# Altium PCB PCB1.PcbDoc
Units mm, origin at the board's own origin, x right, y up, seen from the top; angles counter-clockwise.
Board outline 152.4 x 101.6 mm, 2 copper layers (Top Layer, Bottom Layer); 43 components, 25 nets, 151 pads, 0 vias.
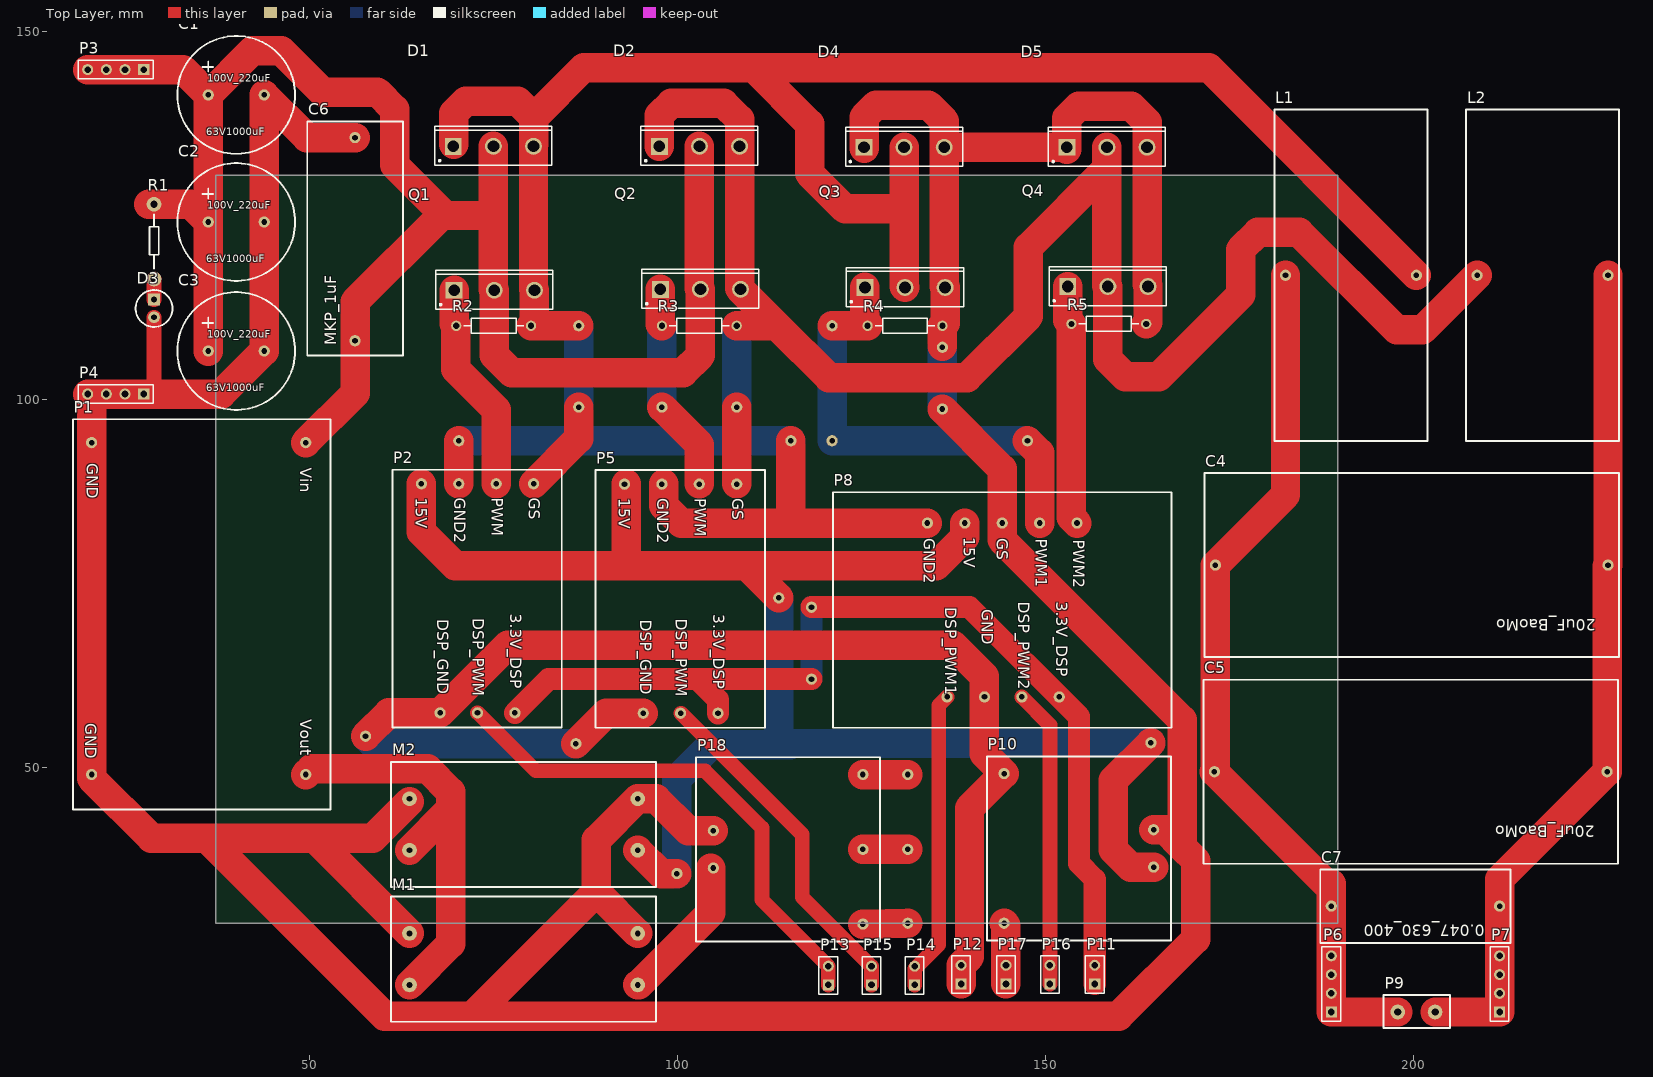
[diagram p0: Top Layer view]
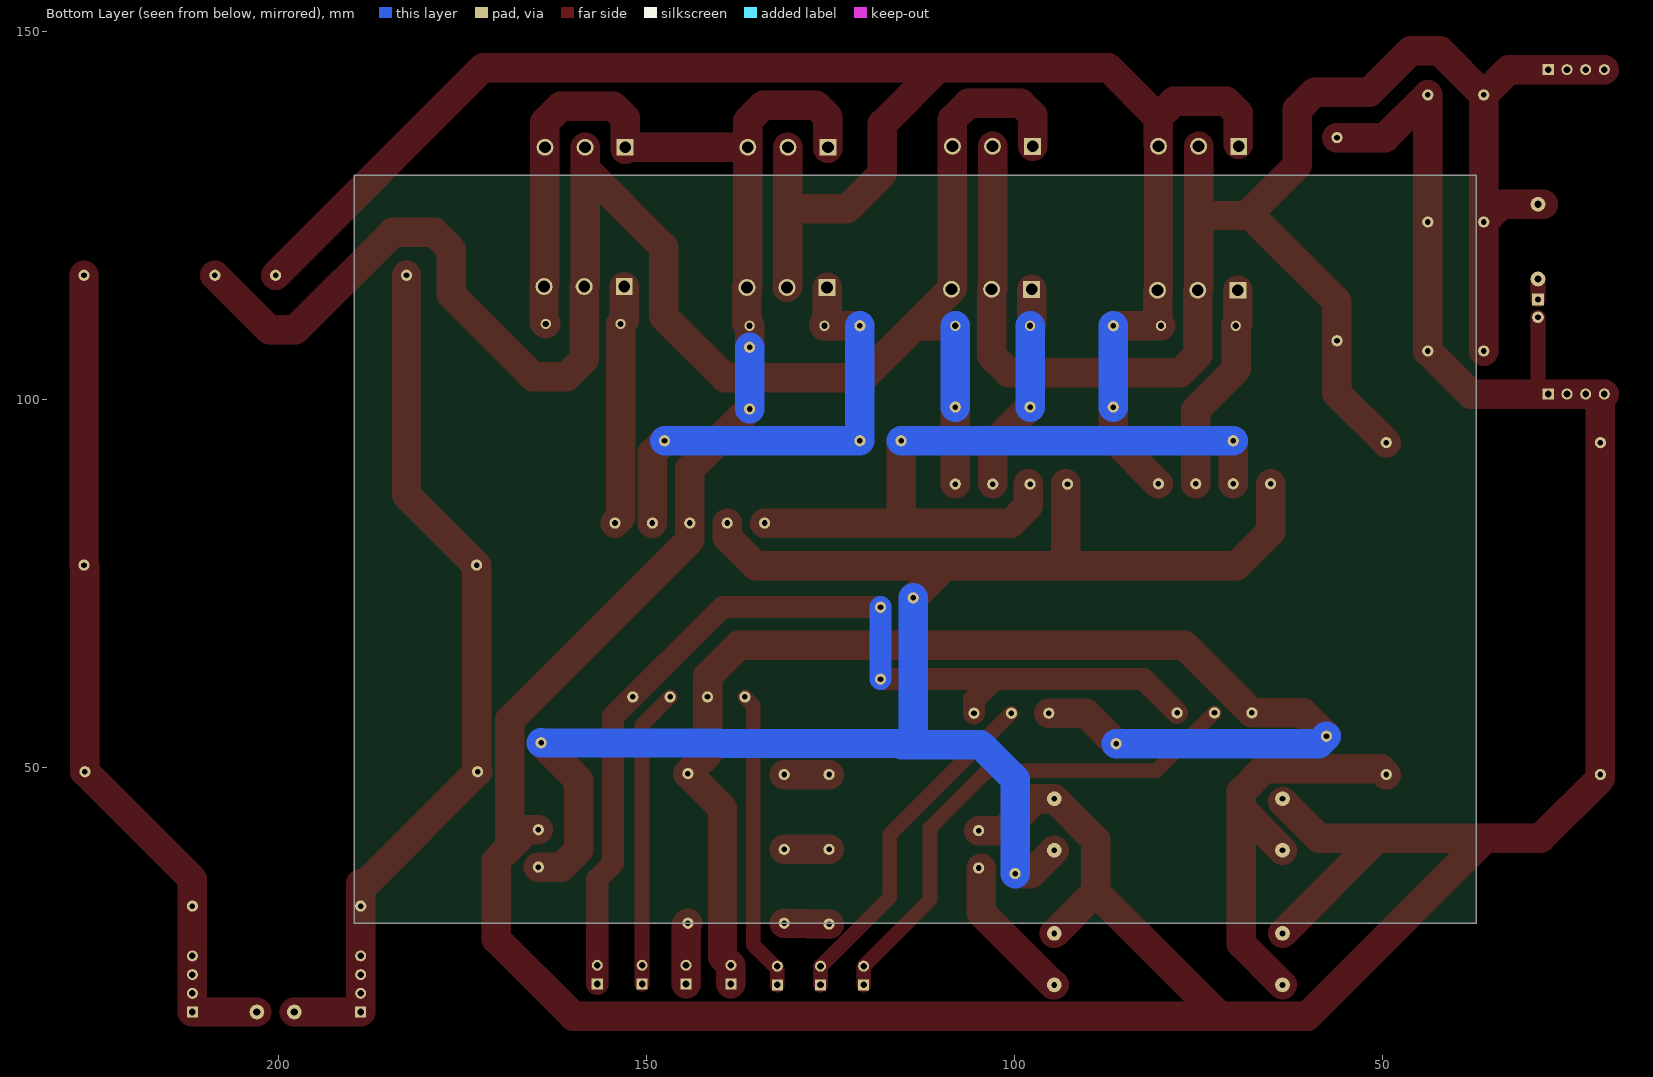
[diagram p1: Bottom Layer view, seen from below]

## Layer stack, top to bottom
Top Solder: solder mask 0.0102, Solder Resist, Dk 3.5
Top Layer: signal copper 0.0356
Dielectric 1: dielectric 0.32, FR-4, Dk 4.8
Bottom Layer: signal copper 0.0356
Bottom Solder: solder mask 0.0102, Solder Resist, Dk 3.5

## Board outline
37.338,28.829 189.738,28.829 189.738,130.429 37.338,130.429

## Design rules (kind name [scope] priority, off if disabled: settings)
Clearance [All] p1: gap=0.254 ignorepadtopadclearanceinfootprint=FALSE except(0: Arc-Hole Track-Hole SMDPad-Hole THPad-Hole Via-Hole Fill-Hole Poly-Hole Region-Hole Text-Hole)
PolygonConnect [All] p1: connectstyle=Relief reliefconductorwidth=0.254 reliefentries=4 polygonreliefangle="90 Angle" airgapwidth=0.254
RoutingVias [All] p1: holewidth=0.711 width=1.27 viastyle="Through Hole" minholewidth=0.711 minwidth=1.27 maxholewidth=0.711 maxwidth=1.27
SolderMaskExpansion [All] p1: expansion=0.102
Width [All] p1: maxlimit=5 minlimit=0.254 preferedwidth=0.254
30 further rules are at their usual default settings.

## Components (designator, comment, footprint, x,y, rotation, side; value= is the part's Value field where it differs from the comment)
C1 "Cap Pol1" C_1000uF_220uF 36.29,141.351 r0 top value=1000uF
C2 "Cap Pol1" C_1000uF_220uF 36.29,124.079 r0 top value=1000uF
C3 "Cap Pol1" C_1000uF_220uF 36.29,106.553 r0 top value=220uF
C4 "Cap Semi" C_20uF_BaoMo 226.441,77.47 r180 top value=20uF
C5 "Cap Semi" C_20uF_BaoMo 226.314,49.403 r180 top value=20uF
C6 "Cap Pol1" C_MKP_1uF 56.229,107.95 r90 top value=1uF
C7 "Cap Semi" C_0047_630_400_47nF 211.709,31.147 r180 top value=47nF
D1 "Diode" SiC-MOS 69.564,134.366 r0 top
D2 "Diode" SiC-MOS 97.558,134.366 r0 top
D3 "LED1" LED 28.924,113.538 r270 top
D4 "Diode" SiC-MOS 125.349,134.239 r0 top
D5 "Diode" SiC-MOS 152.908,134.239 r0 top
L1 "2mH" L_2mH 200.406,116.84 r180 top
L2 "2mH" L_2mH 226.441,116.84 r180 top
M1 "DC/DC_KeTiaoShengYaMoKuai" DC/DC-KeTiaoShengYaMoBan 94.627,20.447 r180 top
M2 "DC/DC_KeTiaoShengYaMoKuai" DC/DC-KeTiaoShengYaMoBan 94.627,38.735 r180 top
P1 "LM2596_Moldel" LM2596_Moldel 17.907,97.282 r270 top
P2 "SiC_Power" SiC_Power 61.309,90.424 r270 top
P3 "Header 4" HDR1X4 27.527,144.78 r180 top
P4 "Header 4" HDR1X4 27.527,100.711 r180 top
P5 "SiC_Power" SiC_Power 88.9,90.372 r270 top
P6 "Header 4" HDR1X4 188.849,16.764 r90 top
P7 "Header 4" HDR1X4 211.709,16.764 r90 top
P8 "SiC_Power_2" SiC_Power_2 121.793,92.583 r270 top
P9 "DuanZi" DuanZi 197.866,16.764 r0 top
P10 "Power_9-36V_5V" Power_9-36V/5V 164.719,36.449 r180 top
P11 "Header 2" HDR1X2 156.718,20.574 r90 top
P12 "Header 2" HDR1X2 138.557,20.574 r90 top
P13 "Header 2" HDR1X2 120.523,20.447 r90 top
P14 "Header 2" HDR1X2 132.249,20.447 r90 top
P15 "Header 2" HDR1X2 126.386,20.447 r90 top
P16 "Header 2" HDR1X2 150.622,20.574 r90 top
P17 "Header 2" HDR1X2 144.653,20.574 r90 top
P18 "Power_18-36V/+-15V" Power_18-36V/-+15V 104.902,38.862 r0 top
Q1 "NMOS-2" SiC-MOS 69.691,114.808 r0 top
Q2 "NMOS-2" SiC-MOS 97.685,114.935 r0 top
Q3 "NMOS-2" SiC-MOS 125.476,115.189 r0 top
Q4 "NMOS-2" SiC-MOS 153.035,115.316 r0 top
R1 "Res2" R 28.924,126.492 r270 top value=20k
R2 "Res2" AXIAL-0.4 75.057,109.982 r180 top value=10k
R3 "Res2" AXIAL-0.4 102.997,109.982 r180 top value=10k
R4 "Res2" AXIAL-0.4 130.937,109.982 r180 top value=10k
R5 "Res2" AXIAL-0.4 158.623,110.236 r180 top value=10k

## Footprints (in the part's own frame and the unit in brackets; to place one, negate y for a bottom-side part, rotate by r counter-clockwise, add the part's x,y. Pads: shape width x height; smd on the part's side, far side on the other; paste and mask are expansions set on the pad)
AXIAL-0.4 [mm] "Axial Device, Thru-Hole; 2 Leads; 0.4 in Pin Spacing"
  round 1.4 hole 0.85: 1(-5.08,0) 2(5.08,0)
  silkscreen extent -4.06,-1.02 4.06,1.02
C_20uF_BaoMo [mil]
  round 60 hole 30: 1(0,0) 2(2100,0)
  silkscreen extent -59,-492 2159,492
C_0047_630_400_47nF [mil]
  round 60 hole 30: 1(0,0) 2(900,0)
  silkscreen extent -59,-197 959,197
C_1000uF_220uF [mil]
  round 60 hole 30: 1(0,0) 2(299.21,0)
  silkscreen extent -165,-315 465,315
C_MKP_1uF [mil]
  round 60 hole 30: 1(0,0) 2(1086.61,0)
  silkscreen extent -79,-256 1173,256
DC/DC-KeTiaoShengYaMoBan [mm]
  round 2 hole 0.8: 1(0,0) 2(0,-7) 3(31,-7) 4(31,0)
  silkscreen extent -2.5,-12 33.5,5
DuanZi [mm]
  round 2 hole 1 unplated: 1(0,0) 2(5.08,0)
  silkscreen extent -1.91,-2.16 7.11,2.29
HDR1X2 [mm] "Connector; Header; 2 Position"
  rect 1.5x1.5 hole 0.9: 1(0,0)
  round 1.5 hole 0.9: 2(2.54,0)
  silkscreen extent -1.27,-1.27 3.81,1.27
HDR1X4 [mm] "Connector; Header; 4 Position"
  rect 1.5x1.5 hole 0.9: 1(0,0)
  round 1.5 hole 0.9: 2(2.54,0) 3(5.08,0) 4(7.62,0)
  silkscreen extent -1.27,-1.27 8.89,1.27
L_2mH [mil]
  round 60 hole 30: 1(0,0) 2(700,0)
  silkscreen extent -59,-886 759,886
LED [mm]
  rect 1.6x1.6 hole 0.8 unplated: 1(0,0)
  round 1.6 hole 0.8 unplated: 2(2.4,0)
  silkscreen extent -1.3,-2.5 3.7,2.5
LM2596_Moldel [mil]
  round 60 hole 30: 1(125,1245) 2(125,100) 3(1900,100) 4(1900,1245)
  silkscreen extent 0,0 2087,1378
Power_9-36V/5V [mil]
  round 60 hole 30: 1(0,0) 2(0,-200) 3(800,-500) 4(800,300)
  silkscreen extent -92,-592 892,392
Power_18-36V/-+15V [mil]
  round 60 hole 30: 1(0,100) 2(0,-100) 3(800,-400) 4(800,400) 5(800,0)
  silkscreen extent -92,-492 892,492
R [mm]
  round 2 hole 1: 1(0,0) 2(10.16,0)
  silkscreen extent 1.4,-0.63 8.76,0.64
SiC-MOS [mm]
  rect 2.3x2.3 hole 1.6: 1(0.011,0)
  round 2.3 hole 1.6: 2(5.461,0) 3(10.911,0)
  silkscreen extent -2.49,-2.6 13.41,2.7, body extent -2.49,-2.6 13.41,2.7, height 24.6
SiC_Power [mil]
  round 60 hole 30: 1(75,755) 2(75,555) 3(75,355) 4(75,155) 5(1300,255) 6(1300,455) 7(1300,655)
  silkscreen extent 0,0 1378,906
SiC_Power_2 [mil]
  round 60 hole 30: 1(370,1280) 2(370,1080) 3(370,880) 4(370,680) 5(370,480) 6(1300,585) 7(1300,785) 8(1300,985) 9(1300,1185)
  silkscreen extent 205,-25 1465,1786

## Part data
C1 C2 C3 C6: "Polarized Capacitor (Radial)", LatestRevisionDate=17-Jul-2002, LatestRevisionNote="Re-released for DXP Platform.", PackageDescription="Polarized Capacitor (Radial); 2 Leads", PackageReference=RB7.6-15, Published=8-Jun-2000, Publisher="Altium Limited"
C4 C5 C7: "Capacitor (Semiconductor SIM Model)", LatestRevisionDate=29-May-2009, LatestRevisionNote="IPC-7351 Footprint Added.", PackageDescription="Chip Capacitor", PackageReference=C1206, Published=8-Jun-2000, Publisher="Altium Limited"
D3: "Typical RED GaAs LED", LatestRevisionDate=08-Jul-2005, LatestRevisionNote="Mech Layer 1 removed.", PackageDescription="LED; 2 Leads", PackageReference=LED-1, Published=8-Jun-2000, Publisher="Altium Limited"
L1 L2: library part L
P3 P4 P6 P7: "Header, 4-Pin", LatestRevisionDate=17-Jul-2002, LatestRevisionNote="Re-released for DXP Platform.", Publisher="Altium Limited"
P11 P12 P13 P14 P15 P16 P17: "Header, 2-Pin", LatestRevisionDate=17-Jul-2002, LatestRevisionNote="Re-released for DXP Platform.", Publisher="Altium Limited"
Q1 Q2 Q3 Q4: "N-Channel Power MOSFET", ComponentLink1Description="Manufacturer Link", ComponentLink1URL=http://www.irf.com/, DatasheetVersion=PD-9.814, LatestRevisionDate=17-Jul-2002, LatestRevisionNote="Re-released for DXP Platform.", Note="Pin 2 is electrically connected to pin 4.", PackageDescription="TO, Thru-Hole, Vertical, Heatsink Mounted; 3 In-Line Leads; Pitch 2.54 mm", PackageReference=TO-220AB, PackageVersion=Feb-1997, Published=8-Jun-2000, Publisher="Altium Limited"
R1 R2 R3 R4 R5: "Resistor", LatestRevisionDate=17-Jul-2002, LatestRevisionNote="Re-released for DXP Platform.", PackageDescription="Axial Device, Thru-Hole; 2 Leads; 0.4 in Pin Spacing", PackageReference=AXIAL-0.4, Published=8-Jun-2000, Publisher="Altium Limited"

## Free pads (board coordinates)
  round 1.524 hole 0.762: 32(86.614,109.982) 33(86.614,98.933) 34(121.031,109.982) 35(136.017,107.061) 36(97.917,98.933) 37(108.077,98.933) 38(136.017,98.679) 39(121.031,94.361) 42(115.443,94.361) 43(70.326,94.361) 44(147.574,94.361) 48(113.792,73.025) 49(99.949,35.56) 50(164.338,53.34) 53(57.658,54.229) 55(86.233,53.213) 56(118.237,61.976) 57(118.237,71.755) 58(131.318,28.829) 59(131.318,38.862) 60(131.318,49.022)

## Nets (pads, with @x,y where several pads share a name; then routed paths per layer and width w, separated by ;. In a path a pad name is that pad's centre, name@x,y a point inside that pad or via, vN(x,y) a via of type N, cw(c..) or ccw(c..) an arc to the next point about the centre after c; other vN are vias at no path point)
5V: M1.4 M2.4 P1.4 | length 57.7
  Top Layer w4: P1.4 50.292,49.784 66.11,49.784 69.215,46.679 69.215,44.323 ; M1.4 69.215,26.035 69.215,44.323 ; M2.4 69.215,44.323
15V: M2.1 P2.4 P5.4 P8.4 P10.1 pad.48 pad.49 pad.50 | length 231.9
  Top Layer w4: P2.4 65.246,81.972 69.811,77.407 93.091,77.407 ; P5.4@93.091,88.519 93.091,77.407 ; M2.1 97.802,35.56 pad.49 ; pad.48 109.41,77.407 ; P8.4 139.065,81.28 135.192,77.407 109.41,77.407 ; pad.50 159.258,48.26 159.258,38.792 161.601,36.449 P10.1 ; 93.091,77.407 109.41,77.407
  Bottom Layer w4: pad.49 99.949,48.387 104.66,53.098 115.328,53.098 115.451,53.221 pad.50 ; 113.792,53.098 pad.48
15V2: P18.5 pad.59 | length 6.1
  Top Layer w4: P18.5 pad.59
20V2: M1.1 P18.2 | length 20
  Top Layer w4: M1.1 94.742,20.447 104.521,30.226 P18.2@104.521,36.322
-15V2: P18.3 pad.58 | length 6.1
  Top Layer w4: P18.3 pad.58
DSP_3.3V: P2.7 P5.7 P8.9 P11.1 P11.2 pad.56 pad.57 | length 137.4
  Top Layer w3: P2.7 82.518,61.976 102.743,61.976 ; P5.7 105.537,59.182 102.743,61.976 ; pad.56 102.743,61.976 ; pad.57 139.7,71.755 154.559,56.896 154.559,36.957 156.718,34.798 P11.1
  Bottom Layer w3: pad.56 pad.57
DSP_5V: P10.4 P17.1 P17.2 | length 8.4
  Top Layer w4: P10.4 144.653,28.575 P17.1
DSP_GND: P2.5 P5.5 P8.7 P10.3 P12.1 P12.2 pad.53 pad.55 | length 176.1
  Top Layer w4: pad.53 60.833,57.404 P2.5 76.993,66.611 137.478,66.611 141.732,62.357 P8.7 141.732,51.816 P10.3 139.7,44.45 139.7,24.257 P12.2 P12.1 ; pad.55 90.372,57.352 P5.5
  Bottom Layer w4: pad.53 58.674,53.213 pad.55
DSP_PWM1: P2.6 P13.1 P13.2 | length 70.2
  Top Layer w2: P2.6 72.898,57.404 80.772,49.53 103.759,49.53 111.506,41.783 111.506,32.004 P13.2 P13.1
DSP_PWM2: P5.6 P15.1 P15.2 | length 47.7
  Top Layer w2: P5.6 100.509,57.352 116.988,40.873 116.988,32.334 126.335,22.987 P15.2 P15.1
DSP_PWM3: P8.6 P14.1 P14.2 | length 40.9
  Top Layer w2: P14.1 132.249,22.648 135.509,25.908 135.509,58.42 P8.6
DSP_PWM4: P8.8 P16.1 P16.2 | length 40.5
  Top Layer w2: P8.8 150.622,55.753 P16.2@150.622,23.194 ; P16.1 P16.2
GND: P2.3 P5.3 P8.5 pad.42 pad.43 | length 101.9
  Top Layer w4: P2.3 pad.43 ; P5.3@98.171,88.519 98.171,85.528 100.514,83.185 115.443,83.185 ; pad.42 115.443,83.185 ; P8.5 115.443,83.185
  Bottom Layer w4: pad.43 pad.42
GND2: P18.4 pad.60 | length 6.1
  Top Layer w4: P18.4 pad.60
GS1: D1.1 D1.3 D4.2 L1.1 P2.1 pad.32 pad.33 Q1.3 Q3.2 R2.1 | length 261.3
  Top Layer w4: D1.1@69.629,134.62 69.629,138.844 71.247,140.462 78.359,140.462 80.529,138.292 ; D1.3 80.475,114.935 Q1.3 80.602,110.447 R2.1 pad.32 ; P2.1 86.614,94.647 pad.33 ; D1.3@80.529,134.62 80.529,138.292 ; D4.2 130.81,125.857 ; Q3.2 130.81,115.316 130.81,125.857 ; L1.1 172.212,145.034 110.363,145.034 ; 80.529,138.292 87.271,145.034 110.363,145.034 ; 110.363,145.034 117.983,137.414 117.983,130.683 122.809,125.857 130.81,125.857
  Bottom Layer w4: pad.33 pad.32
GS2: D2.1 D2.3 D5.2 L2.2 P5.1 pad.37 Q2.3 Q4.2 R3.1 | length 239.1
  Top Layer w4: D2.1 97.569,138.59 99.187,140.208 106.299,140.208 108.469,138.038 D2.3 108.469,115.062 Q2.3 113.549,109.982 ; P5.1@108.077,88.519 pad.37 ; R3.1 113.549,109.982 ; D5.2 158.369,131.318 ; L2.2 201.237,109.416 197.75,109.416 184.484,122.682 178.873,122.682 176.53,120.339 176.53,114.173 165.423,103.066 160.839,103.066 158.496,105.409 Q4.2 158.369,115.443 158.369,131.318 ; 113.549,109.982 120.598,102.933 139.382,102.933 147.701,111.252 147.701,120.65 158.369,131.318
  Bottom Layer w4: pad.37 R3.1
NetD3_1: D3.1 R1.2 | length 2.8
  Top Layer w2: D3.1 R1.2
PWM1: P2.2 Q1.1 R2.2 | length 28.7
  Top Layer w4: Q1.1 69.702,110.257 R2.2 69.89,109.895 69.89,104.1 75.406,98.584 P2.2
PWM2: P5.2 pad.36 Q2.1 R3.2 | length 28.6
  Top Layer w4: Q2.1 97.696,110.203 R3.2 ; pad.36 103.019,93.831 103.019,88.541 P5.2@102.997,88.519
  Bottom Layer w4: pad.36 R3.2
PWM3: P8.2 pad.34 pad.39 pad.44 Q3.1 R4.2 | length 64.1
  Top Layer w4: pad.34 R4.2 ; Q3.1 125.487,110.606 R4.2@125.984,110.109 ; pad.44 149.225,92.71 P8.2
  Bottom Layer w4: pad.34 pad.39 146.939,94.361 pad.44
PWM4: P8.1 Q4.1 R5.2 | length 32.7
  Top Layer w4: Q4.1 153.046,110.733 R5.2 153.543,83.947 P8.1
VGND: C1.2 C2.2 C3.2 C6.2 D3.2 D4.1 D4.3 D5.1 D5.3 M1.2 M1.3 M2.2 M2.3 P1.2 P1.3 P4.1 P4.2 P4.3 P4.4 P8.3 P10.2 P18.1 pad.35 pad.38 Q3.3 Q4.3 R4.1 R5.1 | length 621.2
  Top Layer w2: P4.1 28.924,102.108 D3.2
  Top Layer w4: C6.2 49.691,135.55 C1.2 C2.2 C3.2 38.048,100.711 P4.1 P4.2 P4.3 P4.4 20.447,100.171 P1.2 P1.3 20.447,48.514 28.575,40.386 36.036,40.386 ; M1.3 50.688,40.386 ; M2.3@63.627,45.354 58.659,40.386 50.688,40.386 ; M1.2 89.027,33.047 ; P18.1 101.473,41.402 97.14,45.735 M2.2 89.027,40.135 89.027,33.047 ; D4.1@125.382,134.112 125.382,138.336 127,139.954 134.112,139.954 136.282,137.784 D4.3@136.282,134.239 ; pad.38 144.145,90.551 P8.3 144.145,80.899 168.592,56.452 168.592,39.306 168.529,39.243 ; pad.35@136.017,107.187 R4.1 ; R4.1@136.387,110.352 Q3.3 136.26,115.316 D4.3 D4.3@136.282,134.239 ; D5.1 D4.3@136.282,134.239 ; D5.1@152.941,133.985 152.941,138.209 154.559,139.827 161.671,139.827 163.841,137.657 D5.3@163.841,134.239 ; R5.1 163.946,110.479 163.946,115.523 163.819,115.65 D5.3 ; P10.2 166.243,41.529 168.529,39.243 ; 36.036,40.386 50.688,40.386 ; 36.036,40.386 60.229,16.193 72.173,16.193 ; 72.173,16.193 159.957,16.193 170.434,26.67 170.434,37.338 168.529,39.243 ; 72.173,16.193 89.027,33.047
  Bottom Layer w4: pad.38 pad.35
Vin: C1.1 C2.1 C3.1 C6.1 D1.2 D2.2 P1.1 P3.1 P3.2 P3.3 P3.4 Q1.2 Q2.2 R1.1 | length 242.4
  Top Layer w4: P3.4 P3.3 P3.2 P3.1 32.861,144.78 C1.1 ; R1.1@28.194,126.492 R1.1 33.877,126.492 C2.1 ; C3.1 C2.1 ; P1.1 56.229,100.806 C6.1 56.229,113.252 67.945,124.968 75.025,124.968 ; 68.453,124.968 61.595,131.826 61.595,139.389 59.252,141.732 51.816,141.732 46.228,147.32 42.259,147.32 C1.1 ; D1.2 75.025,124.968 ; D2.2 103.019,115.062 Q2.2 103.146,105.975 100.803,103.632 77.495,103.632 75.152,105.975 Q1.2 75.025,114.935 75.025,124.968 ; C2.1 C1.1
VOUT1: C4.2 C5.2 C7.2 L1.2 P6.1 P6.2 P6.3 P6.4 P9.1 | length 120
  Top Layer w4: L1.2 182.626,86.995 C4.2 173.101,49.53 C5.2 188.214,34.163 188.849,34.163 C7.2 P6.4 P6.3 P6.2 P6.1 P9.1
VOUT2: C4.1 C5.1 C7.1 L2.1 P7.1 P7.2 P7.3 P7.4 P9.2 | length 114.9
  Top Layer w4: P9.2 P7.1 P7.2 P7.3 P7.4 C7.1 211.709,34.798 C5.1 226.314,77.343 C4.1 L2.1

## Text inside footprints (layer, text, board x,y; h text height)
C1: Top Overlay "63V1000uF" at 36.036,135.89 h1; Top Overlay "100V_220uF" at 36.163,143.129 h1
C2: Top Overlay "63V1000uF" at 36.036,118.618 h1; Top Overlay "100V_220uF" at 36.163,125.857 h1
C3: Top Overlay "63V1000uF" at 36.036,101.092 h1; Top Overlay "100V_220uF" at 36.163,108.331 h1
C4: Top Overlay "20uF_BaoMo" at 224.79,70.104 h1.52 r180
C5: Top Overlay "20uF_BaoMo" at 224.663,42.037 h1.52 r180
C6: Top Overlay "MKP_1uF" at 53.689,107.315 h1.52 r90
C7: Top Overlay "0.047_630_400" at 209.677,28.607 h1.52 r180
P1: Top Overlay "Vout" at 48.768,56.515 h1.52 r270; Top Overlay "GND" at 19.558,56.007 h1.52 r270; Top Overlay "GND" at 19.812,91.313 h1.52 r270; Top Overlay "Vin" at 48.768,90.678 h1.52 r270
P2: Top Overlay "DSP_GND" at 67.405,70.104 h1.52 r270; Top Overlay "DSP_PWM" at 72.231,70.231 h1.52 r270; Top Overlay "3.3V_DSP" at 77.311,70.866 h1.52 r270; Top Overlay "15V" at 64.484,86.614 h1.52 r270; Top Overlay "GND2" at 69.691,86.614 h1.52 r270; Top Overlay "PWM" at 74.771,86.614 h1.52 r270; Top Overlay "GS" at 79.851,86.614 h1.52 r270
P5: Top Overlay "DSP_GND" at 94.996,70.052 h1.52 r270; Top Overlay "DSP_PWM" at 99.822,70.179 h1.52 r270; Top Overlay "3.3V_DSP" at 104.902,70.814 h1.52 r270; Top Overlay "15V" at 92.075,86.562 h1.52 r270; Top Overlay "GND2" at 97.282,86.562 h1.52 r270; Top Overlay "PWM" at 102.362,86.562 h1.52 r270; Top Overlay "GS" at 107.442,86.562 h1.52 r270
P8: Top Overlay "DSP_PWM1" at 136.398,71.755 h1.52 r270; Top Overlay "GND" at 141.351,71.501 h1.52 r270; Top Overlay "DSP_PWM2" at 146.304,72.517 h1.52 r270; Top Overlay "3.3V_DSP" at 151.511,72.517 h1.52 r270; Top Overlay "GND2" at 133.477,81.153 h1.52 r270; Top Overlay "15V" at 138.938,81.28 h1.52 r270; Top Overlay "GS" at 143.383,81.153 h1.52 r270; Top Overlay "PWM1" at 148.717,81.026 h1.52 r270; Top Overlay "PWM2" at 153.797,80.899 h1.52 r270